# Altium PCB Estacion_Meteorologica_Sensor_BH1750.PcbDoc
Units mm, origin at the board's own origin, x right, y up, seen from the top; angles counter-clockwise.
Board outline 20 x 20 mm, 2 copper layers (Top Layer, Bottom Layer); 6 components, 73 nets, 18 pads, 0 vias.
Unrouted connection lines stored in the file: 4.
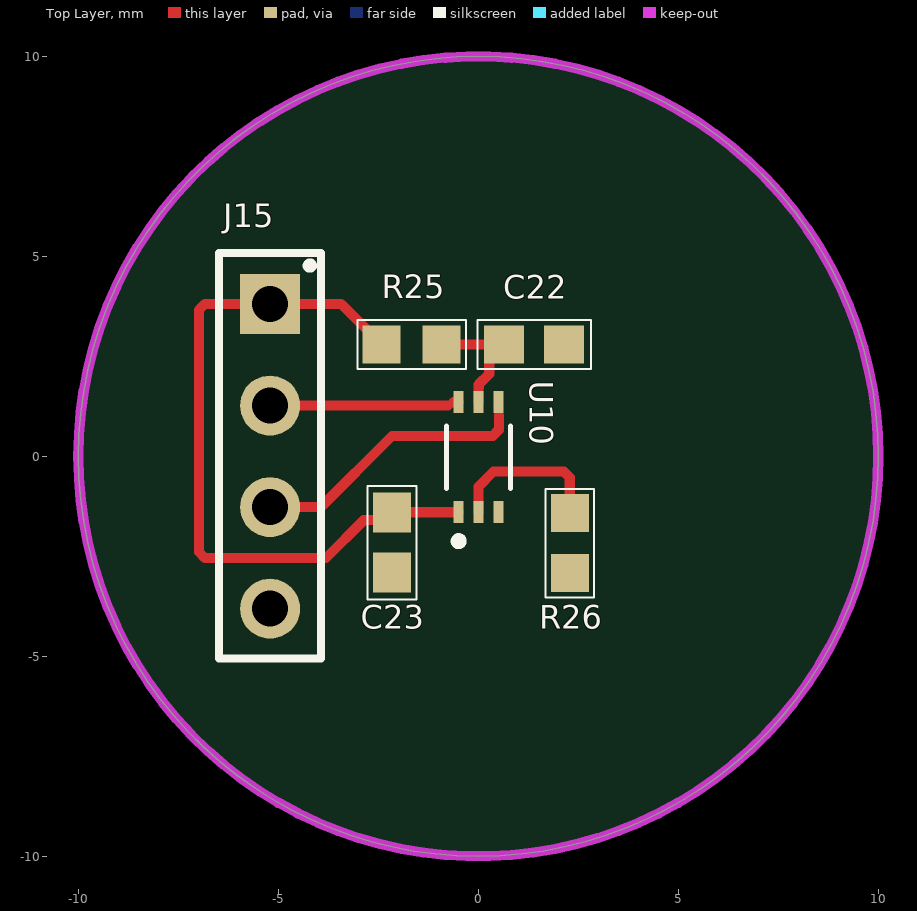
[diagram p0: Top Layer view]
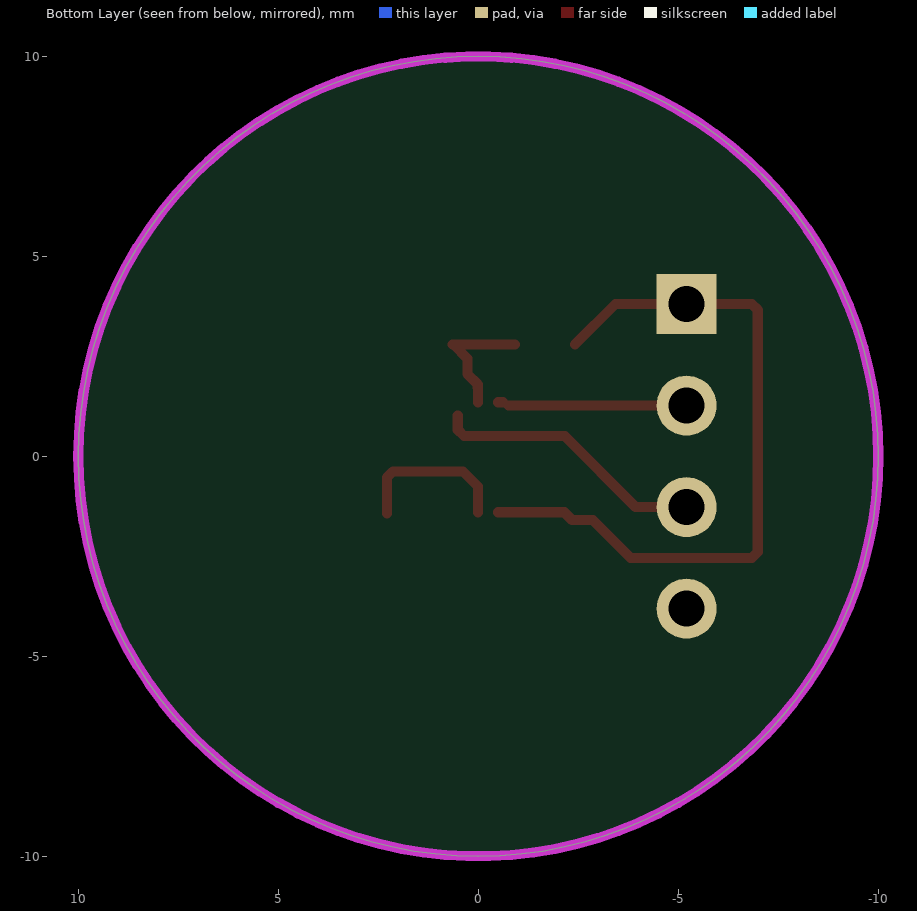
[diagram p1: Bottom Layer view, seen from below]
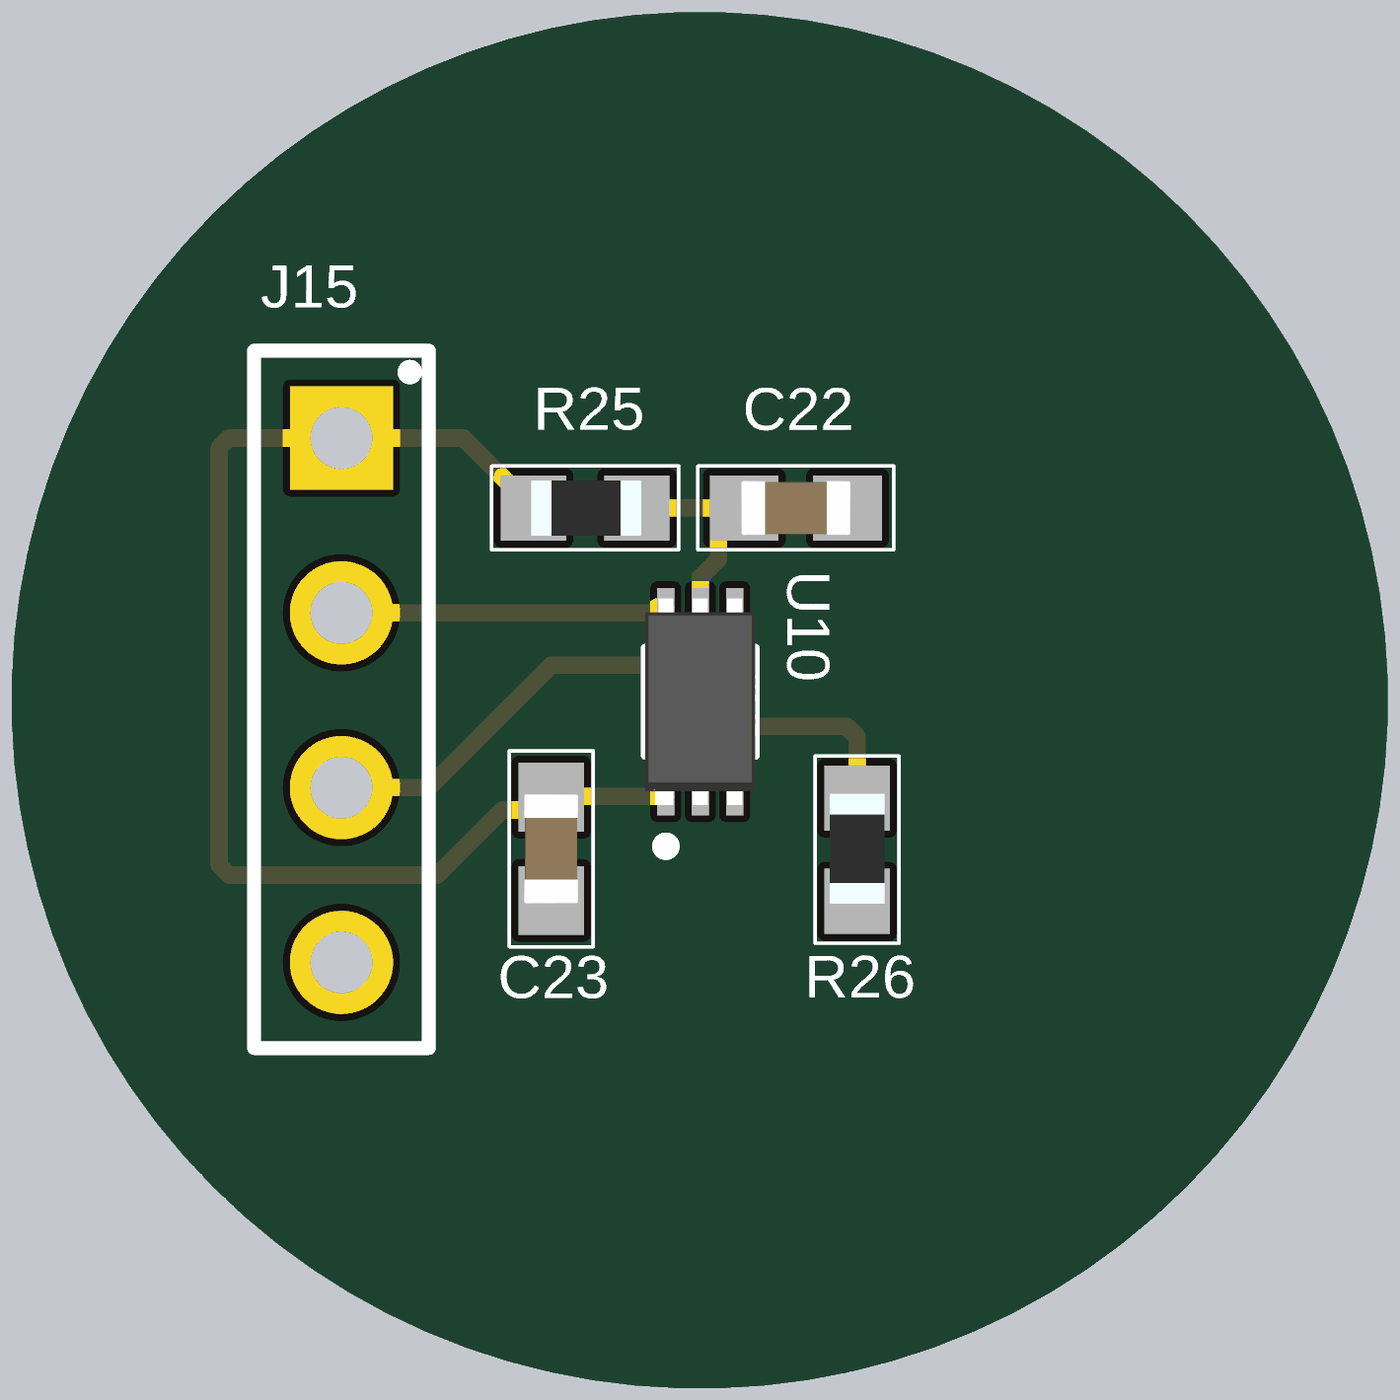
[diagram p2: 3D render of the assembled board from above, using the file's embedded part models]

## Layer stack, top to bottom
Top Solder: solder mask 0.0102, Solder Resist, Dk 3.5
Top Layer: signal copper 0.0356
Dielectric 1: dielectric 0.32, FR-4, Dk 4.8
Bottom Layer: signal copper 0.0356
Bottom Solder: solder mask 0.0102, Solder Resist, Dk 3.5

## Board outline
0,-10 cw(c0,0) -10,0 cw(c0,0) 0,10 cw(c0,0) 10,0 cw(c0,0)

## Design rules (kind name [scope] priority, off if disabled: settings)
Clearance [All] p1: gap=0.254 ignorepadtopadclearanceinfootprint=FALSE
DiffPairsRouting [All] p1: maxlimit=0.254 minlimit=0.254 mostfreqgap=0.254 toplayer_minwidth=0.381 toplayer_maxwidth=0.381 toplayer_prefwidth=0.381 bottomlayer_minwidth=0.381 bottomlayer_maxwidth=0.381 bottomlayer_prefwidth=0.381 maxuncoupledlength=12.7
PolygonConnect [All] p1: connectstyle=Relief reliefconductorwidth=0.254 reliefentries=4 polygonreliefangle="90 Angle" airgapwidth=0.254
RoutingVias [All] p1: holewidth=0.711 width=1.27 viastyle="Through Hole" minholewidth=0.711 minwidth=1.27 maxholewidth=0.711 maxwidth=1.27
SolderMaskExpansion [All] p1: expansion=0.102 istentingtop=FALSE
SupplyNets "Schematic Supply Nets_5" [InNet('GND')] p1: voltage=0.000
SupplyNets "Schematic Supply Nets_4" [InNet('VDD3V')] p2: voltage=0.000
SupplyNets "Schematic Supply Nets_3" [InNet('VIN')] p3: voltage=0.000
SupplyNets "Schematic Supply Nets_2" [InNet('VDD5V')] p4: voltage=0.000
SupplyNets "Schematic Supply Nets_1" [InNet('+3V3')] p5: voltage=0.000
SupplyNets "Schematic Supply Nets" [InNet('VBUS')] p6: voltage=0.000
Width [All] p1: maxlimit=0.254 minlimit=0.254 preferedwidth=0.254
29 further rules are at their usual default settings.

## Classes and differential pairs
component class Consola_ESP32: J15
differential pair D: +D_P -D_N

## Components (designator, comment, footprint, x,y, rotation, side; value= is the part's Value field where it differs from the comment)
C22 "1uF" CAPCP1608_0603 1.397,2.794 r0 top
C23 "0.1uF" CAPCP1608_0603 -2.159,-2.159 r90 top
J15 "I2C" HDR1X4 -5.182,2.54 r270 top
R25 "1K" RESC1608_0603 -1.651,2.794 r0 top
R26 "4.7" RESC1608_0603 2.286,-2.159 r90 top
U10 "BH1750FVI-TR" XDCR_BH1750FVI-TR 0.008,-0.022 r90 top

## Footprints (in the part's own frame and the unit in brackets; to place one, negate y for a bottom-side part, rotate by r counter-clockwise, add the part's x,y. Pads: shape width x height; smd on the part's side, far side on the other; paste and mask are expansions set on the pad)
CAPCP1608_0603 [mm] "Chip Capacitor, 2-Leads, Body 1.60x0.80mm, IPC Medium Density"
  rect 1x0.95 smd: 1(-0.75,0) 2(0.75,0)
  silkscreen extent -1.42,-0.61 1.42,0.61, body extent -0.8,-0.4 0.8,0.4, height 0.9
HDR1X4 [mm]
  rect 1.5x1.5 hole 0.9: 1(-1.27,-0.025)
  round 1.5 hole 0.9: 2(1.27,-0.025) 3(3.81,-0.025) 4(6.35,-0.025)
  silkscreen extent -2.54,-1.3 7.59,1.24
RESC1608_0603 [mm]
  rect 0.95x0.95 smd: 1(-0.763,0) 2(0.737,0)
  silkscreen extent -1.37,-0.61 1.35,0.61, body extent -0.8,-0.4 0.8,0.4, height 0.45
XDCR_BH1750FVI-TR [mm]
  rect 0.55x0.25 smd: 1(-1.375,0.5) 2(-1.375,0) 3(-1.375,-0.5) 4(1.375,-0.5) 5(1.375,0) 6(1.375,0.5)
  silkscreen extent -2.2,-0.8 0.78,0.8, body extent -1.5,-0.8 1.5,0.8, height 0.75

## Part data
C22: library part C0603X105J4RACTU, "Capacitor_1uF_0603"
C23: library part 06035C104K4T4A, "Capacitor_0.1uF_0603"
J15: library part Connector_04
R25: library part RCA06031K00JNEA, "Resistencia_1K_0603"
R26: library part RCA06034K70FKEA, "Resistencia_4.7K_0603"
U10: "Optical Sensor Ambient 560nm IÂ²C 6-SMD, Flat Lead Exposed Pad", Package="SMD-6 ROHM Semiconductor", Availability="In Stock", Check_prices=https://www.snapeda.com/parts/BH1750FVI-TR/Rohm/view-part/?ref=eda, MF=Rohm, MP=BH1750FVI-TR, Price=None, Purchase-URL=https://pricing.snapeda.com/search/part/BH1750FVI-TR/?ref=eda, SnapEDA_Link=https://www.snapeda.com/parts/BH1750FVI-TR/Rohm/view-part/?ref=snap

## Nets (pads, with @x,y where several pads share a name; then routed paths per layer and width w, separated by ;. In a path a pad name is that pad's centre, name@x,y a point inside that pad or via, vN(x,y) a via of type N, cw(c..) or ccw(c..) an arc to the next point about the centre after c; other vN are vias at no path point)
+3V3: C23.2 J15.1 R25.1 U10.1 | length 18.1
  Top Layer w0.254: R25.1 -3.43,3.81 J15.1 -6.836,3.81 -6.985,3.661 -6.985,-2.391 -6.836,-2.54 -3.81,-2.54 -2.866,-1.596 -2.346,-1.596 -2.147,-1.397 U10.1
A2: 
A3: 
A4: 
ACTIVE: 
AREF: 
"D3 IRQ": 
"D4 RST": 
"D8 CS": 
D10: 
D11: 
D12: 
D13: 
D_N: 
D_P: 
DIO1: 
DIO2: 
DIO3: 
DIO5: 
DSR: 
DTR: 
EN: 
GND: C22.2 C23.1 J15.4 R26.1 U10.3
IO0: 
IO2: 
IO4: 
IO5: 
IO16: 
IO17: 
IO18: 
IO23: 
MISO: 
MOSI: 
NetC7_1: 
NetC9_1: 
NetC10_1: 
NetC13_2: 
NetC15_2: 
NetC17_2: 
NetC22_1: C22.1 R25.2 U10.5 | length 3.4
  Top Layer w0.254: R25.2 C22.1 0.622,2.794 0.274,2.446 0.274,2.058 0.014,1.798 ; U10.5 0.008,1.792 0.014,1.798 ; 0.014,1.723 0.014,1.798
NetD2_2: 
NetD7_2: 
NetD11_2: 
NetJ1_A5: 
NetJ1_B5: 
NetJ8_1: 
NetQ1_2: 
NetQ2_2: 
NetR2_1: 
NetR8_2: 
NetR9_2: 
NetR13_1: 
NetR18_1: 
NetR19_1: 
NetR23_2: 
NetR24_2: 
NetR26_2: R26.2 U10.2 | length 4
  Top Layer w0.254: U10.2 0.008,-0.754 0.381,-0.381 2.137,-0.381 2.286,-0.53 R26.2
RAIN: 
RESET: 
RTS: 
SCK: 
SCL: J15.2 U10.6 | length 4.6
  Top Layer w0.254: J15.2 -0.762,1.27 ; -0.619,1.353 U10.6
SDA: J15.3 U10.4 | length 6.9
  Top Layer w0.254: J15.3 -3.937,-1.27 -2.159,0.508 0.359,0.508 0.514,0.663 0.514,1.016
SWCLK: 
SWDIO: 
U0RX: 
U0TX: 
VBUS: 
VDD3V: 
VDD5V: 
VIN: 
WDIR: 
WSPEED: 

## Keep-outs
Keep-Out Layer:
  circle w0.254: c0,0 r10